# Altium PCB PCB_Dpad&Trigger.PcbDoc
Units mm, origin at the board's own origin, x right, y up, seen from the top; angles counter-clockwise.
Board outline 49.13 x 26 mm, 2 copper layers (Top Layer, Bottom Layer); 9 components, 7 nets, 37 pads, 0 vias.
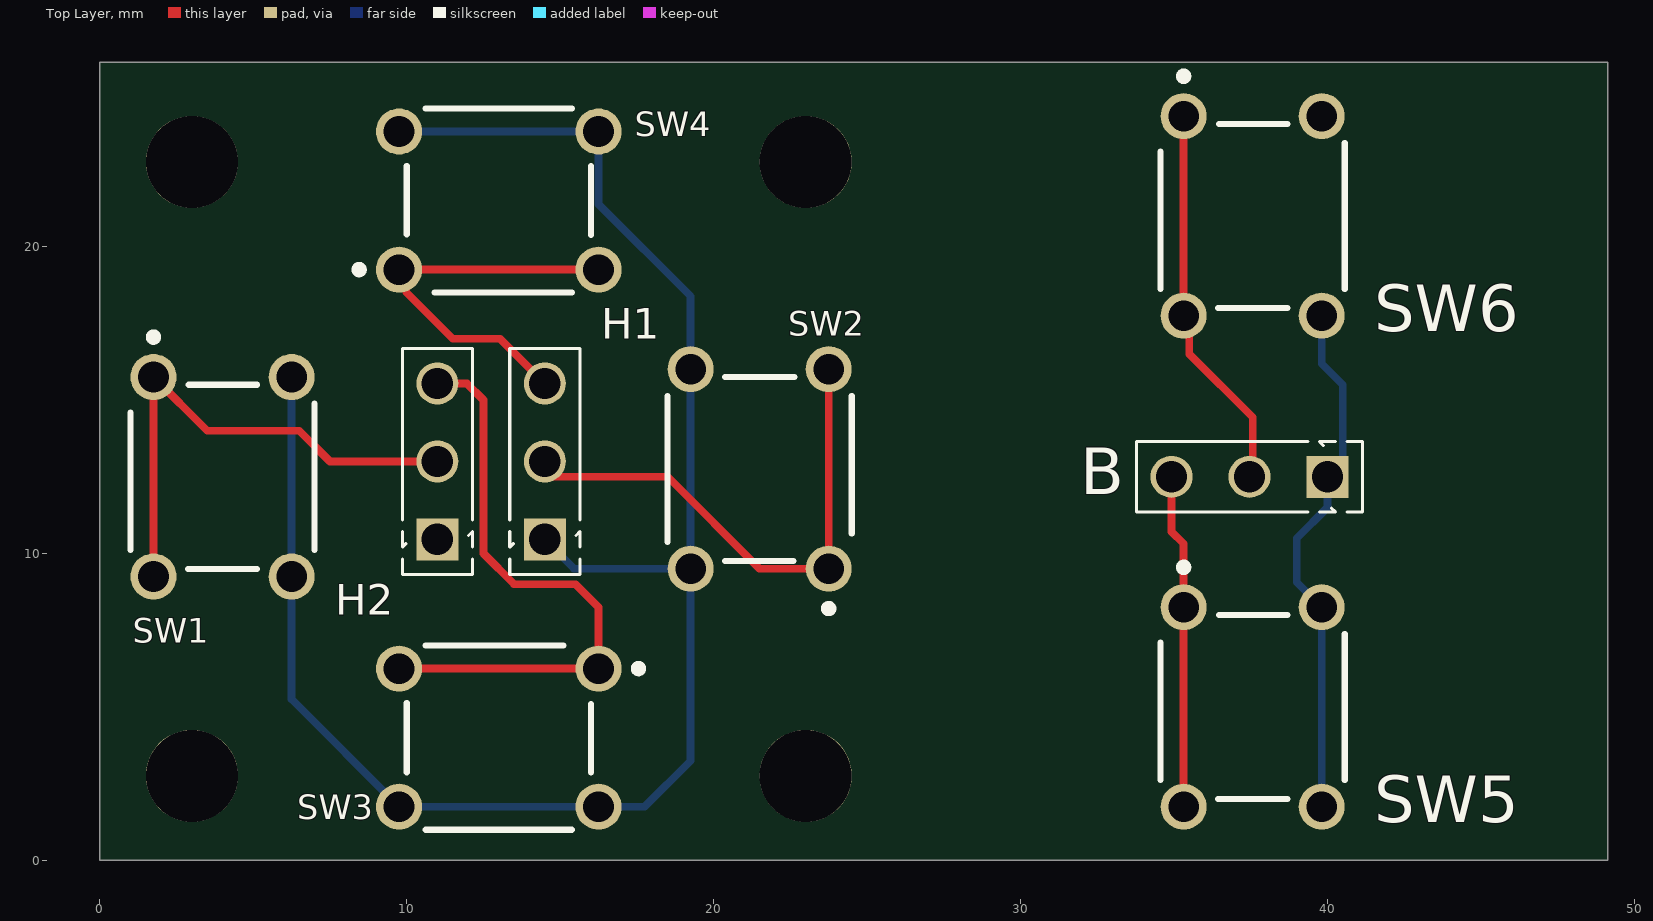
[diagram p0: Top Layer view]
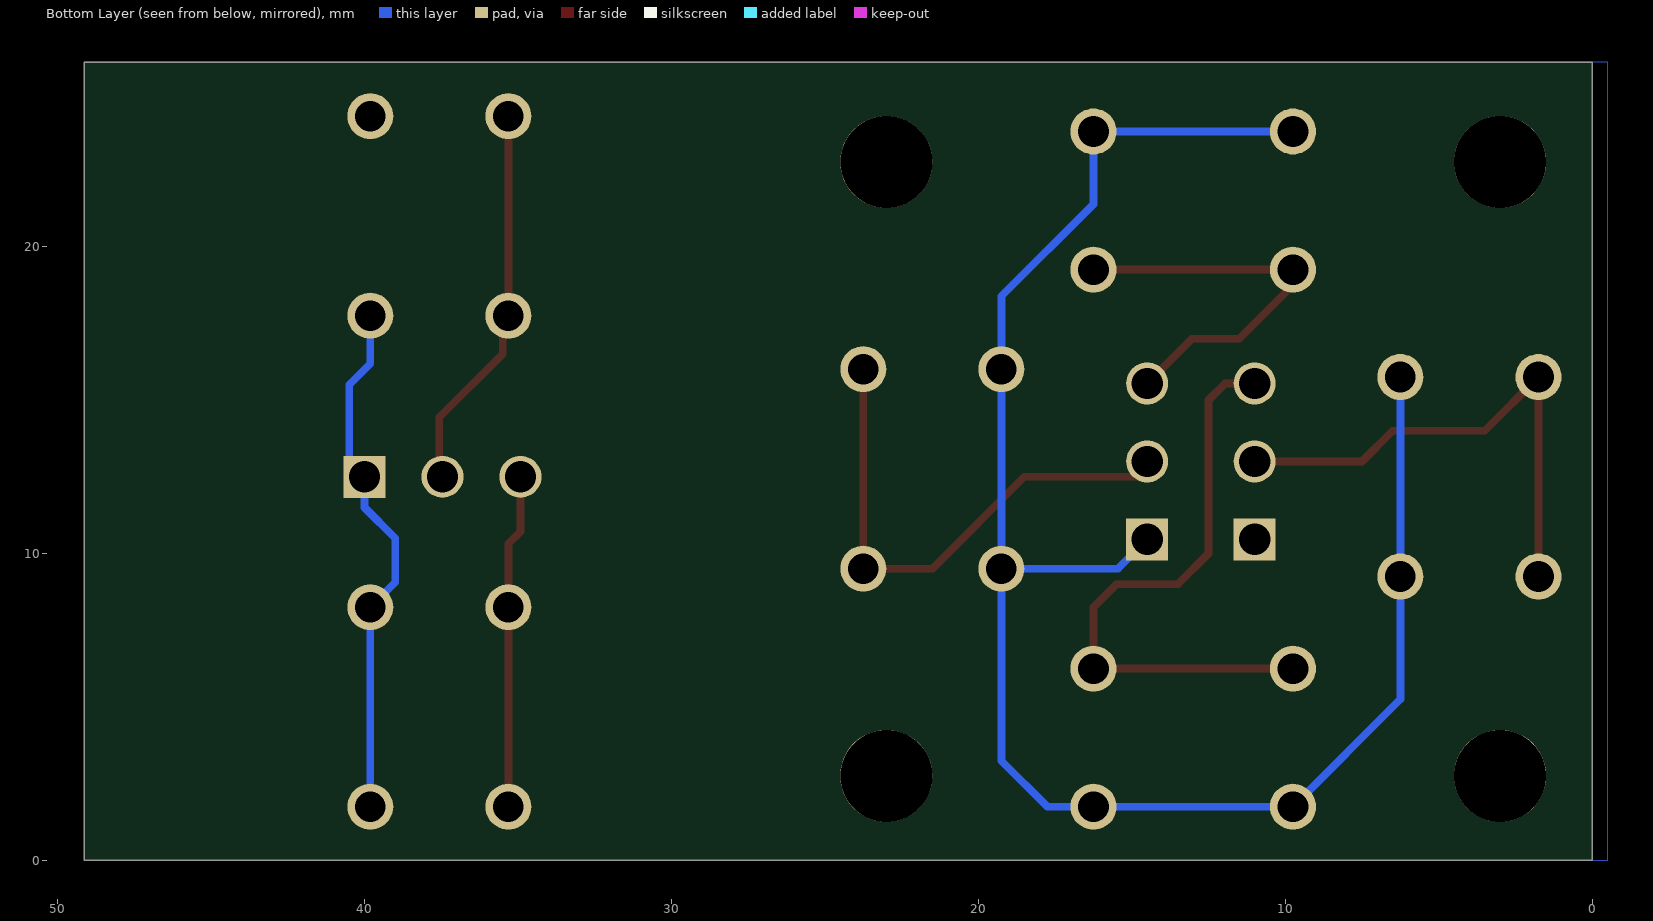
[diagram p1: Bottom Layer view, seen from below]
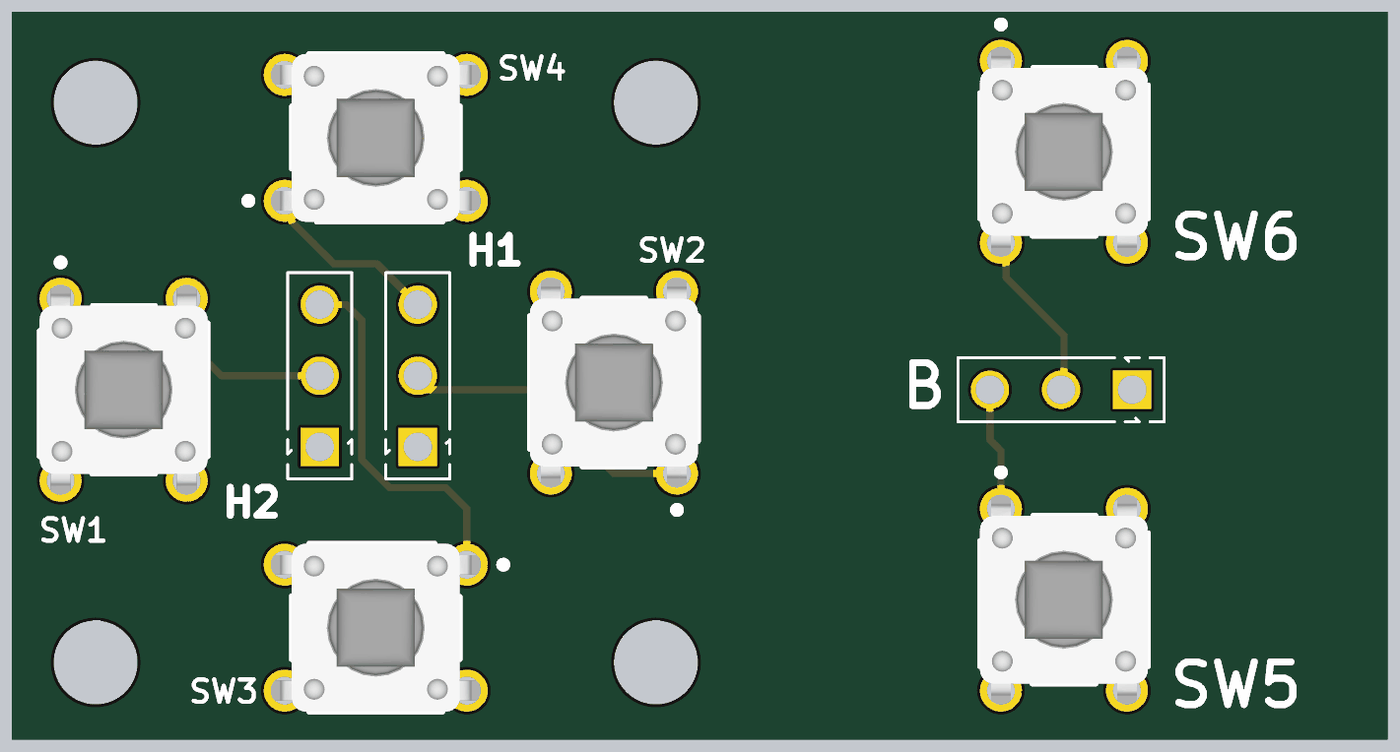
[diagram p2: 3D render of the assembled board from above, using the file's embedded part models]

## Layer stack, top to bottom
Top Solder: solder mask 0.0102, Solder Resist, Dk 3.5
Top Layer: signal copper 0.0356
Dielectric 1: dielectric 0.32, FR-4, Dk 4.8
Bottom Layer: signal copper 0.0356
Bottom Solder: solder mask 0.0102, Solder Resist, Dk 3.5

## Board outline
0,0 49.126,0 49.126,26 0,26

## Design rules (kind name [scope] priority, off if disabled: settings)
Clearance [All] p1: gap=0.254 ignorepadtopadclearanceinfootprint=FALSE
HoleSize [All] p1: absolutevalues=TRUE maxlimit=3.5 minlimit=0.025 maxpercent=80.000 minpercent=20.000
PolygonConnect [All] p1: connectstyle=Relief reliefconductorwidth=0.254 reliefentries=4 polygonreliefangle="90 Angle" airgapwidth=0.254
RoutingVias [All] p1: holewidth=0.711 width=1.27 viastyle="Through Hole" minholewidth=0.711 minwidth=1.27 maxholewidth=0.711 maxwidth=1.27
SolderMaskExpansion [All] p1: expansion=0.102 istentingtop=FALSE
SupplyNets "Schematic Supply Nets_4" [InNet('GND')] p1: voltage=0.000
SupplyNets "Schematic Supply Nets_3" [InNet('D')] p2: voltage=0.000
SupplyNets "Schematic Supply Nets_2" [InNet('B')] p3: voltage=0.000
SupplyNets "Schematic Supply Nets_1" [InNet('A')] p4: voltage=0.000
SupplyNets "Schematic Supply Nets" [InNet('C')] p5: voltage=0.000
Width [All] p1: maxlimit=0.254 minlimit=0.254 preferedwidth=0.254
29 further rules are at their usual default settings.

## Classes and differential pairs
component class PCB_Dpad&Trigger: B H1 H2 SW1 SW2 SW3 SW4

## Components (designator, comment, footprint, x,y, rotation, side; value= is the part's Value field where it differs from the comment)
B "HDR,2.54mm,1x3" HEADER_2.54MM_1x3PIN 37.46,12.5 r180 top
H1 "HDR,2.54mm,1x3" HEADER_2.54MM_1x3PIN 14.5,13 r90 top
H2 "HDR,2.54mm,1x3" HEADER_2.54MM_1x3PIN 11,13 r90 top
SW1 "TL1105SPF160Q" ESWI-TL1105SPF_V 4,12.5 r270 top
SW2 "TL1105SPF160Q" ESWI-TL1105SPF_V 21.5,12.757 r90 top
SW3 "TL1105SPF160Q" ESWI-TL1105SPF_V 13,4 r180 top
SW4 "TL1105SPF160Q" ESWI-TL1105SPF_V 13,21.5 r0 top
SW5 "TL1105SPF160Q" ESWI-TL1105SPF_V 37.563,5 r270 top
SW6 "TL1105SPF160Q" ESWI-TL1105SPF_V 37.563,21 r270 top

## Footprints (in the part's own frame and the unit in brackets; to place one, negate y for a bottom-side part, rotate by r counter-clockwise, add the part's x,y. Pads: shape width x height; smd on the part's side, far side on the other; paste and mask are expansions set on the pad)
ESWI-TL1105SPF_V [mm] "THD, 4-Leads, Body 6x6mm"
  round 1.5 hole 1: 1(-3.25,-2.25) 2(3.25,-2.25) 3(-3.25,2.25) 4(3.25,2.25)
  silkscreen extent -4.67,-3 3,3, body extent -3.95,-3 3.95,3, height 7.4
HEADER_2.54MM_1x3PIN [mm]
  rect 1.37x1.37 hole 1.02: 1(-2.54,0)
  round 1.37 hole 1.02: 2(0,0) 3(2.54,0)
  silkscreen extent -3.68,-1.14 3.68,1.14, body extent -3.68,-1.14 3.68,1.14, height 8.2

## Part data
B H1 H2: "Connector - 2.54mm, 1x3-pin"
SW1 SW2 SW3 SW4 SW5 SW6: library part CMP-2000-07248-1, "Tact Switch, SPST-NO, 50 mA, 12 VDC, -20 to 70 degC, 4-Pin THD, RoHS, Bulk", Manufacturer=E-Switch, Package Description="4-Pin Through Hole Device, Body 6 x 6 mm", Package Reference=TL1105SPF, Actuation Force=1.6N, Actuator Style=RoundButton, Contact Material=Silver, Datasheet URL=https://www.e-switch.com/system/asset/product_line/data_sheet/140/TL1105.pdf, Datasheet Version=12/2013, Manufacturer URL=http://www.e-switch.ch/en/, Mounting Technology=ThroughHole, Package URL=http://spec_sheets.e-switch.com/specs/P010201.pdf, Size=6x6mm, Termination Style=RightAngle

## Free pads (board coordinates)
  round 3 hole 3 unplated: ""(3,2.757) ""(3,22.757) ""(23,2.757) ""(23,22.757)

## Nets (pads, with @x,y where several pads share a name; then routed paths per layer and width w, separated by ;. In a path a pad name is that pad's centre, name@x,y a point inside that pad or via, vN(x,y) a via of type N, cw(c..) or ccw(c..) an arc to the next point about the centre after c; other vN are vias at no path point)
A: H2.3 SW3.1 SW3.2 | length 19.7
  Top Layer w0.254: SW3.2 SW3.1 16.25,8.25 15.5,9 13.5,9 12.5,10 12.5,15 11.96,15.54 H2.3
B: H1.2 SW2.1 SW2.2 | length 17
  Top Layer w0.254: H1.2@14.5,12.5 18.5,12.5 21.493,9.507 SW2.1 SW2.2
C: H1.3 SW4.1 SW4.2 | length 13.8
  Top Layer w0.254: H1.3@14.286,15.714 14.286,15.254 H1.3@14.5,15.04 ; H1.3 13.04,17 11.5,17 9.988,18.512 9.988,19.012 SW4.1 SW4.2
D: H2.2 SW1.1 SW1.2 | length 16.9
  Top Layer w0.254: SW1.2 SW1.1 3.5,14 6.5,14 7.5,13 H2.2
E: B.3 SW5.1 SW5.2 | length 10.9
  Top Layer w0.254: B.3 34.92,10.708 35.313,10.315 SW5.1 SW5.2
F: B.2 SW6.1 SW6.2 | length 12.7
  Top Layer w0.254: SW6.1 SW6.2 35.5,17.563 35.5,16.5 37.563,14.437 37.563,12.603 B.2
GND: B.1 H1.1 H2.1 SW1.3 SW1.4 SW2.3 SW2.4 SW3.3 SW3.4 SW4.3 SW4.4 SW5.3 SW5.4 SW6.3 SW6.4 | length 75.5
  Bottom Layer w0.254: SW1.3 SW1.4 6.25,5.25 SW3.4 SW3.3 17.75,1.75 19.25,3.25 SW2.3 ; SW4.3 SW4.4 16.25,21.378 19.25,18.378 SW2.4 SW2.3 ; H1.1 15.453,9.507 SW2.3 ; SW5.4 SW5.3 39,9.063 39,10.5 40,11.5 B.1 ; SW6.4 39.813,16.187 40.5,15.5 B.1@40.5,13

## Polygon pours and split planes (outlines as drawn)
GND on Bottom Layer "NONET_L02_P000" (solid, shelved, pour order 0): 49.126,26 49.126,0 -0.5,0 -0.5,26

## Silkscreen, mask and mechanical layers (free items; w line width, h text height)
Mechanical 1:
  lines w0.254: 25.5,0.037 25.537,0 49.126,0 ; 25.5,25.757 25.743,26 48.816,26 49.126,25.69 49.126,0 ; 49.126,0 49.126,0
  lines w0.5: 0,-0.243 0,25.757 25.5,25.757 25.5,-0.243 0,-0.243
Mechanical 15:
  lines w0.1: 11.857,6.494 14.143,6.494 ; 11.857,18.94 14.143,18.94